# EAGLE board Buttons_old (EAGLE 6.3)
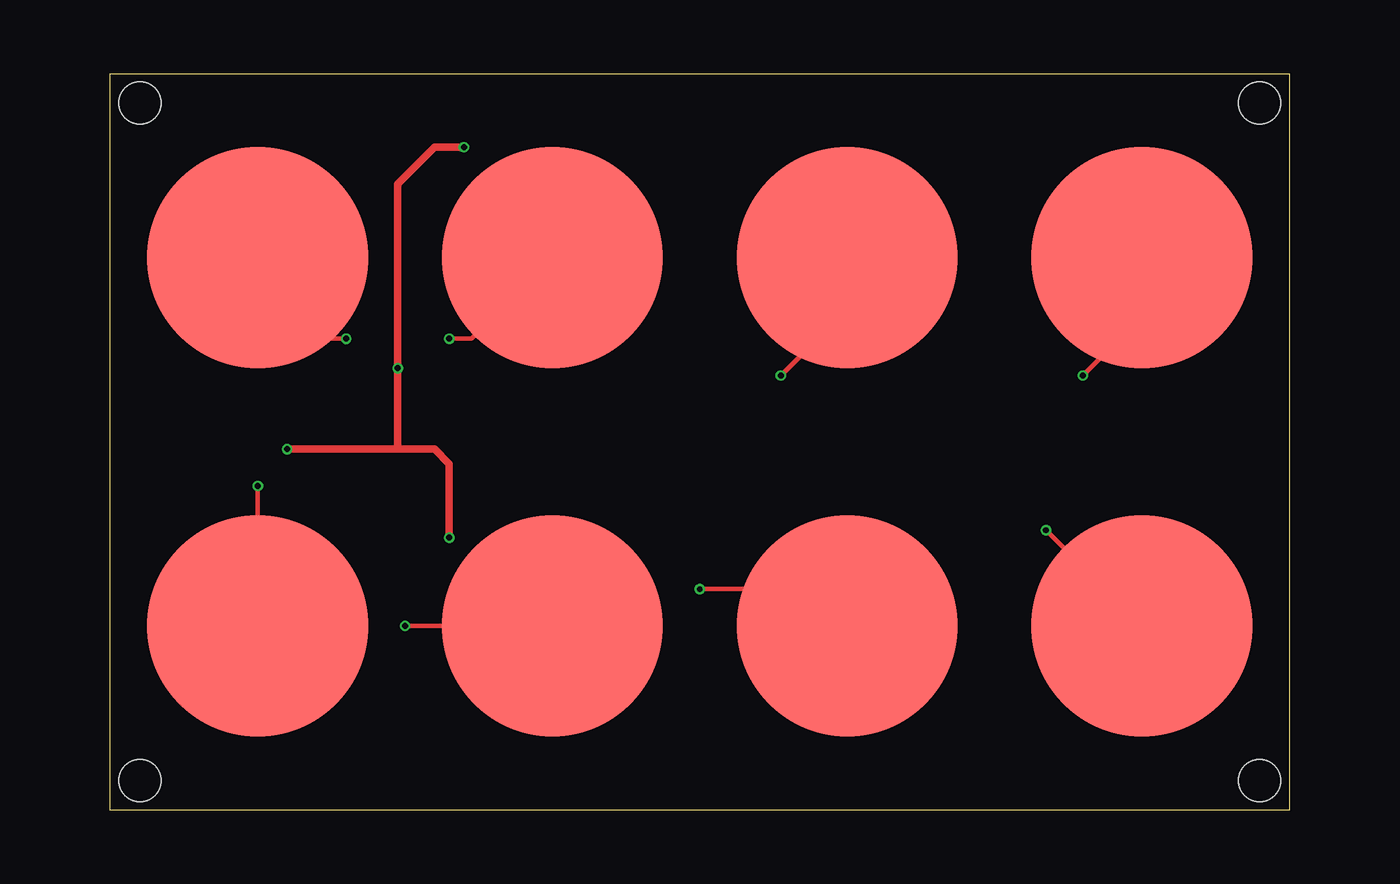
[diagram p0: board, top side]
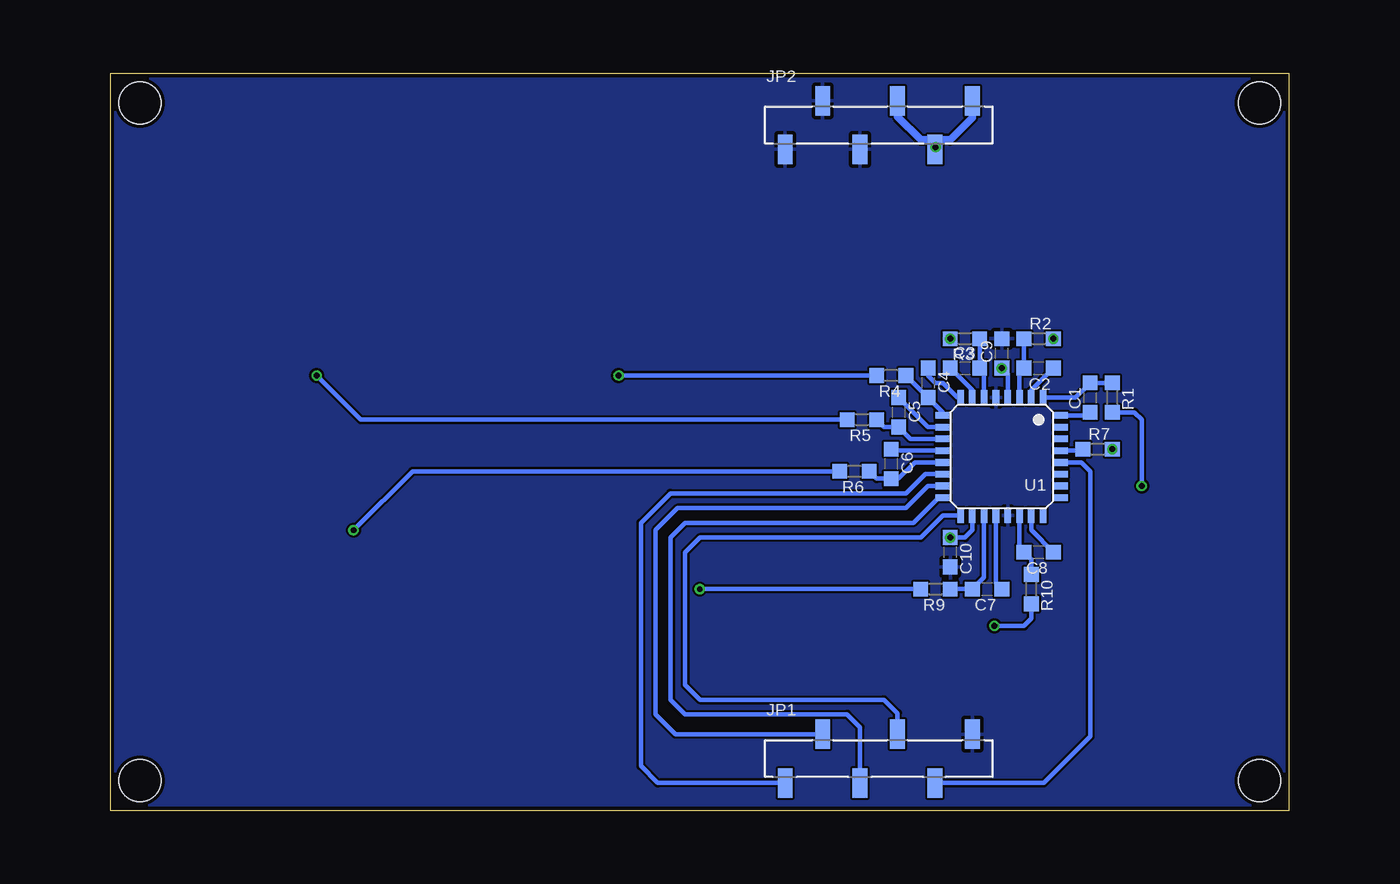
[diagram p1: board, bottom side, seen from below]

Size 80 x 50 mm. Coordinates in mm from the lower left corner, seen from the top.
Outline: 0,0 0,50 80,50 80,0 0,0
Copper layers (1*16): Top 0.035mm / dielectric 1.5mm / Bottom 0.035mm
Design rules "default": minimum track width 6mil, minimum drill 15mil, track to track 6mil, track to pad 6mil, pad to pad 6mil, via to via 6mil, smd to smd 0mil, copper to edge 10mil, drill to drill 10mil, minimum pad ring 10mil, minimum via ring 6mil, stop-mask expansion 2mil, vias tented up to drill 100mil, thermal gap 10mil
Holes 2.84 mm at 2,2 2,48 78,48 78,2

## Footprints (pad centres in the part's own frame; a part is rotated, then mirrored left to right if it is on the bottom)
C0603 = smd 1 x 1: 1 -1,0; 2 1,0
1X06_SMD_STRAIGHT = smd 1 x 2: 1 0,1.65; 2 -2.54,-1.65; 3 -5.08,1.65; 4 -7.62,-1.65; 5 -10.16,1.65; 6 -12.7,-1.65
R0603 = smd 1 x 1: 1 -1,0; 2 1,0
TOUCH-CIRCLE-15MM = smd 15 x 15: P$1 0,0
S-PQFP-N32 = smd 0.45 x 1: 1 -2.8,-4; 2 -2,-4; 3 -1.2,-4; 4 -0.4,-4; 5 0.4,-4; 6 1.2,-4; 7 2,-4; 8 2.8,-4; 17 2.8,4; 18 2,4; 19 1.2,4; 20 0.4,4; 21 -0.4,4; 22 -1.2,4; 23 -2,4; 24 -2.8,4 | smd 1 x 0.45: 9 4,-2.8; 10 4,-2; 11 4,-1.2; 12 4,-0.4; 13 4,0.4; 14 4,1.2; 15 4,2; 16 4,2.8; 25 -4,2.8; 26 -4,2; 27 -4,1.2; 28 -4,0.4; 29 -4,-0.4; 30 -4,-1.2; 31 -4,-2; 32 -4,-2.8

## Placement (x,y rotation side)
C1  10n  [C0603]  13.5,28 90 bottom
C2  10n  [C0603]  17,30 180 bottom
C3  10n  [C0603]  22,30 0 bottom
C4  10n  [C0603]  24.5,29 270 bottom
C5  10n  [C0603]  26.5,27 270 bottom
C6  10n  [C0603]  27,23.5 270 bottom
C7  10n  [C0603]  20.5,15 180 bottom
C8  10n  [C0603]  17,17.5 180 bottom
C9  100n  [C0603]  19.5,31 90 bottom
C10  100n  [C0603]  23,17.5 270 bottom
JP1  [1X06_SMD_STRAIGHT]  21.5,3.5 0 bottom
JP2  [1X06_SMD_STRAIGHT]  21.5,46.5 0 bottom
R1  4.7K  [R0603]  12,28 270 bottom
R2  4.7K  [R0603]  17,32 0 bottom
R3  4.7K  [R0603]  22,32 180 bottom
R4  4.7K  [R0603]  27,29.5 180 bottom
R5  4.7K  [R0603]  29,26.5 180 bottom
R6  4.7K  [R0603]  29.5,23 180 bottom
R7  100K  [R0603]  13,24.5 0 bottom
R9  4.7K  [R0603]  24,15 180 bottom
R10  4.7K  [R0603]  17.5,15 270 bottom
SW1  TOUCH_PAD-CIRCLE-15MM  [TOUCH-CIRCLE-15MM]  10,12.5 0 top
SW2  TOUCH_PAD-CIRCLE-15MM  [TOUCH-CIRCLE-15MM]  10,37.5 0 top
SW3  TOUCH_PAD-CIRCLE-15MM  [TOUCH-CIRCLE-15MM]  30,37.5 0 top
SW4  TOUCH_PAD-CIRCLE-15MM  [TOUCH-CIRCLE-15MM]  50,37.5 0 top
SW5  TOUCH_PAD-CIRCLE-15MM  [TOUCH-CIRCLE-15MM]  70,37.5 0 top
SW6  TOUCH_PAD-CIRCLE-15MM  [TOUCH-CIRCLE-15MM]  70,12.5 0 top
SW7  TOUCH_PAD-CIRCLE-15MM  [TOUCH-CIRCLE-15MM]  50,12.5 0 top
SW8  TOUCH_PAD-CIRCLE-15MM  [TOUCH-CIRCLE-15MM]  30,12.5 0 top
U1  AT42QT1110-TQFP  [S-PQFP-N32]  19.5,24 180 bottom

## Library data of the parts
C1-C10 R1-R7 R9 R10 = rcl
JP1 JP2 = SparkFun-Connectors
SW1-SW8 U1 = 00-EvaLibrary

## Nets
N$1: C1.2 R1.1 U1.1
N$2: C2.2 R2.1 U1.3
N$3: C3.2 R3.1 U1.6
N$4: C4.2 R4.1 U1.9
N$5: C5.2 R5.1 U1.11
N$6: C6.2 R6.1 U1.13
N$7: C1.1 U1.32
N$8: R1.2 SW1.P$1
N$9: C2.1 U1.2
N$10: R2.2 SW2.P$1
N$11: C3.1 U1.7
N$12: R3.2 SW3.P$1
N$13: C4.1 U1.8
N$14: R4.2 SW4.P$1
N$15: C5.1 U1.10
N$16: R5.2 SW5.P$1
N$17: C6.1 U1.12
N$18: R6.2 SW6.P$1
N$19: R7.1 U1.29
N$20: JP1.2 U1.28
N$22: C8.2 R10.1 U1.22
N$23: C7.2 R9.1 U1.19
N$25: JP1.6 U1.14
N$26: JP1.5 U1.15
N$27: JP1.4 U1.16
N$28: JP1.3 U1.17
N$29: R10.2 SW8.P$1
N$30: R9.2 SW7.P$1
N$31: C8.1 U1.23
N$32: C7.1 U1.20
VDD: C9.1 C10.1 JP2.1 JP2.2 JP2.3 R7.2 U1.4 U1.18
VSS: C9.2 C10.2 JP1.1 JP2.4 JP2.5 JP2.6 U1.5 U1.21

## Tracks (layer width: path | path; a pad name or v marks a point on that pad's centre or on a via)
N$1
  Bottom 0.3: R1.1 C1.2 14.5,28 U1.1
N$2
  Bottom 0.3: U1.3 18.3,29.7 C2.2 R2.1
N$3
  Bottom 0.3: U1.6 20.7,29.7 C3.2 R3.1
N$4
  Bottom 0.3: U1.9 23.5,27 C4.2 R4.1
N$5
  Bottom 0.3: U1.11 25.7,25.2 C5.2 27.5,26 R5.1
N$6
  Bottom 0.3: U1.13 25.4,23.6 26.5,22.5 C6.2 28,22.5 R6.1
N$7
  Bottom 0.3: U1.32 13.7,26.8 C1.1
N$8  (via drill 0.4)
  Top 0.3: SW1.P$1 v10,22
  Bottom 0.3: v10,22 10,26.5 10.5,27 R1.2
N$9
  Bottom 0.3: U1.2 17.5,28.5 C2.1
N$10  (via drill 0.4)
  Top 0.3: SW2.P$1 10,36.5 14.5,32 R2.2
  other vias: 16,32
N$11
  Bottom 0.3: U1.7 21.5,28.5 C3.1
N$12  (via drill 0.4)
  Top 0.3: SW3.P$1 24.5,32 R3.2
  other vias: 23,32
N$13
  Bottom 0.3: U1.8 22.5,28 23.5,29 24,29 24.5,29.5 C4.1
N$14  (via drill 0.4)
  Top 0.3: SW4.P$1 50,34 v45.5,29.5
  Bottom 0.3: R4.2 v45.5,29.5
N$15
  Bottom 0.3: U1.10 24.5,26 C5.1
N$16  (via drill 0.4)
  Top 0.3: SW5.P$1 70,33.5 v66,29.5
  Bottom 0.3: v66,29.5 63,26.5 R5.2
N$17
  Bottom 0.3: U1.12 26.4,24.4 C6.1
N$18  (via drill 0.4)
  Top 0.3: v63.5,19 SW6.P$1
  Bottom 0.3: R6.2 59.5,23 v63.5,19
N$19
  Bottom 0.3: U1.29 14.1,24.4 R7.1
N$20
  Bottom 0.3: JP1.2 16.65,1.85 13.5,5 13.5,23 14.1,23.6 U1.28
N$22
  Bottom 0.3: U1.22 18.3,17.8 C8.2 17.5,17 R10.1
N$23
  Bottom 0.3: R9.1 C7.2 20.7,15.8 U1.19
N$25
  Bottom 0.3: JP1.6 42.85,1.85 44,3 44,19.5 42,21.5 26,21.5 24.7,22.8 U1.14
N$26
  Bottom 0.3: U1.15 24.5,22 26,20.5 41.5,20.5 43,19 43,6.5 41.65,5.15 JP1.5
N$27
  Bottom 0.3: U1.16 23.8,21.2 25.5,19.5 41,19.5 42,18.5 42,7.5 41,6.5 30,6.5 29.12,5.62 JP1.4
N$28
  Bottom 0.3: U1.17 23.5,20 25,18.5 40,18.5 41,17.5 41,8.5 40,7.5 27.5,7.5 26.58,6.58 JP1.3
N$29  (via drill 0.4)
  Top 0.3: SW8.P$1 v20,12.5
  Bottom 0.3: v20,12.5 18,12.5 17.5,13 R10.2
N$30  (via drill 0.4)
  Top 0.3: v40,15 47.5,15 SW7.P$1
  Bottom 0.3: R9.2 v40,15
N$31
  Bottom 0.3: U1.23 17.5,19 C8.1
N$32
  Bottom 0.3: U1.20 19.9,15.4 C7.1
VDD  (via drill 0.4)
  Top 0.5: R7.2 19.5,24.5 | 19.5,24.5 C9.1 19.5,42.5 22,45 v24,45 | 19.5,24.5 22,24.5 23,23.5 C10.1
  Bottom 0.3: U1.4 19.1,29.6 C9.1 | U1.18 21.5,19 22,18.5 C10.1
  Bottom 0.5: JP2.1 21.5,47 23,45.5 23.5,45.5 v24,45 24.04,45.54 JP2.2 24.19,45.5 25,45.5 26.58,47.08 JP2.3
  other vias: 12,24.5 19.5,30 23,18.5
VSS
  pour Bottom: 0,50 80,50 80,0 0,0